# Altium PCB business card.PcbDoc
Units mm, origin at the board's own origin, x right, y up, seen from the top; angles counter-clockwise.
Board outline 85.6 x 54.21 mm, 4 copper layers (Component Side, Ground Plane, Power Plane, Solder Side), stack 0.844 mm thick; 5 components, 5 nets, 16 pads, 0 vias.
Unrouted connection lines stored in the file: 5.
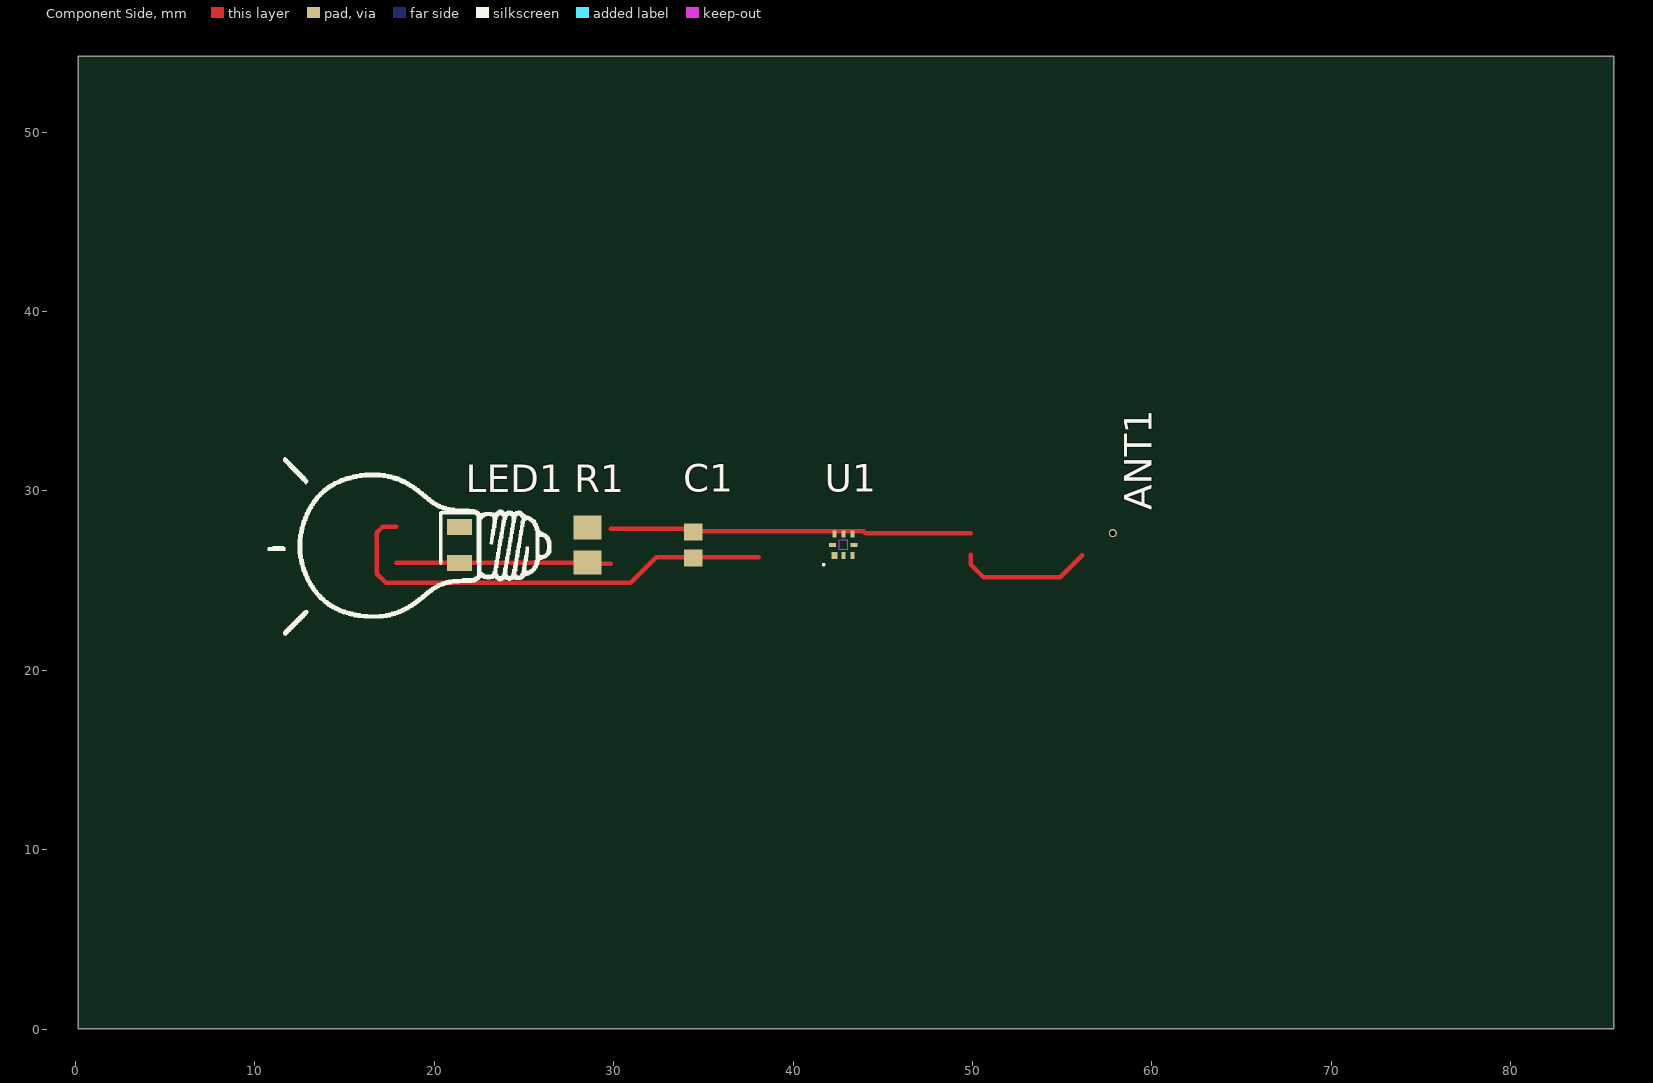
[diagram p0: Component Side view]
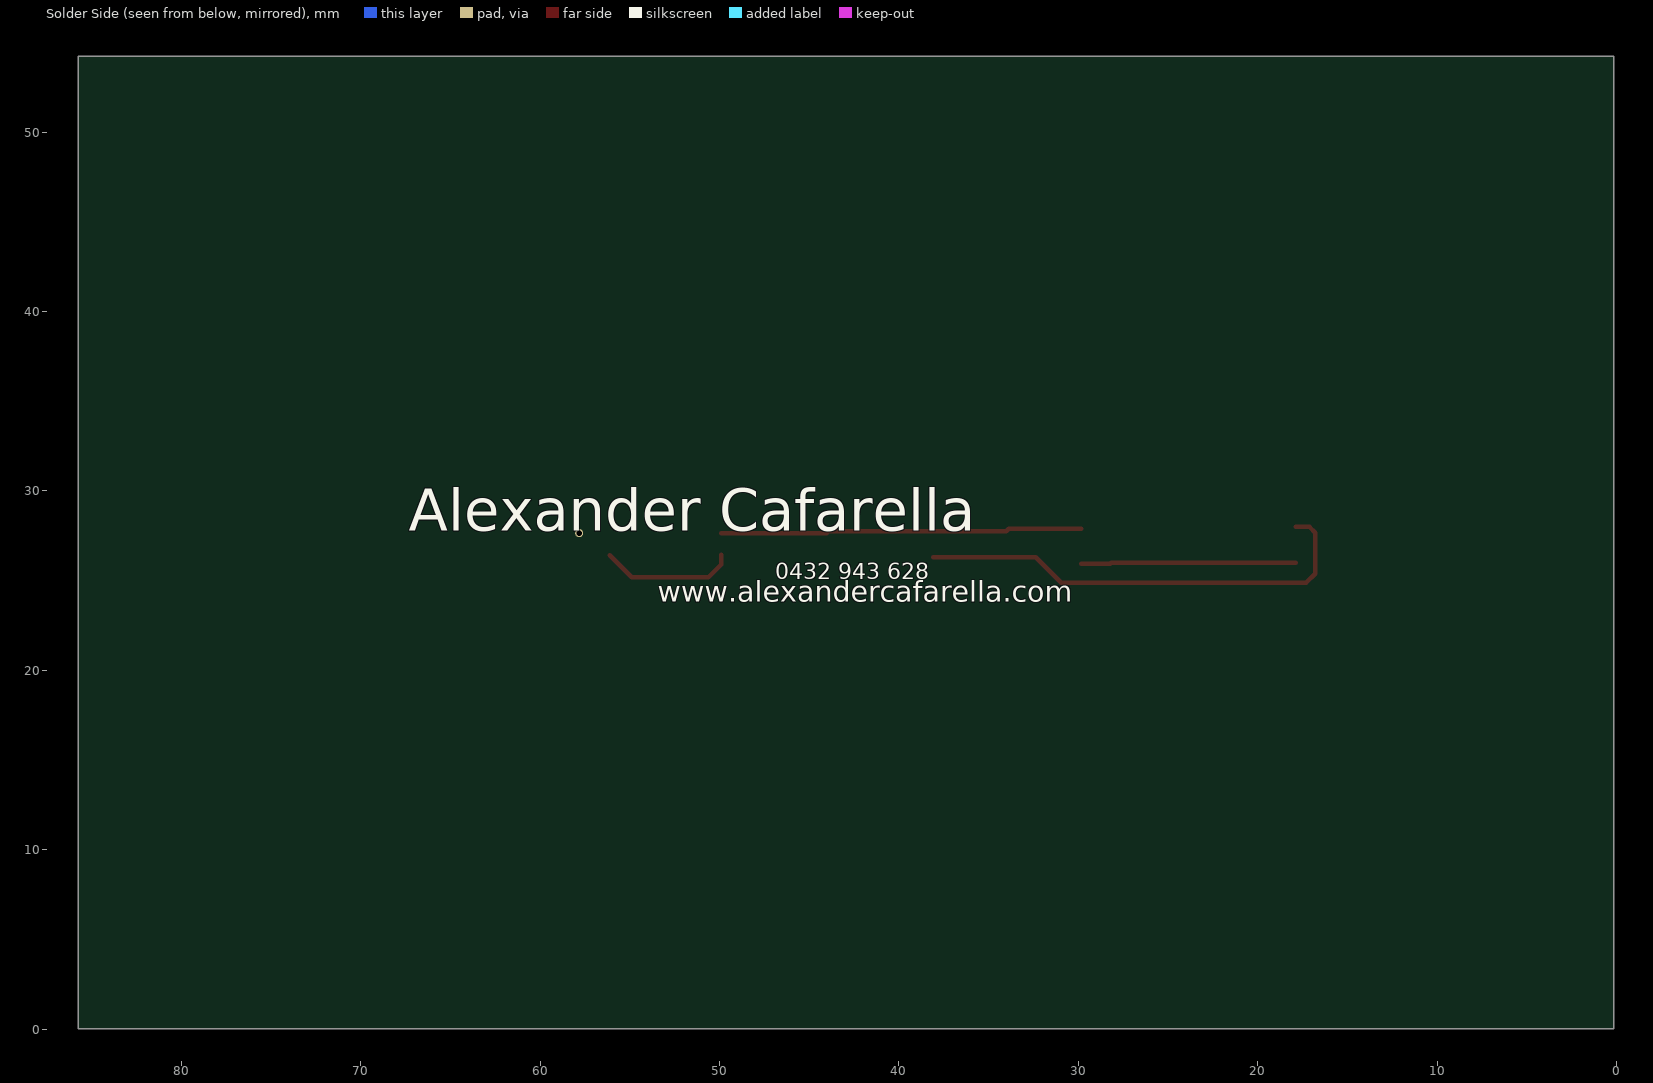
[diagram p1: Solder Side view, seen from below]
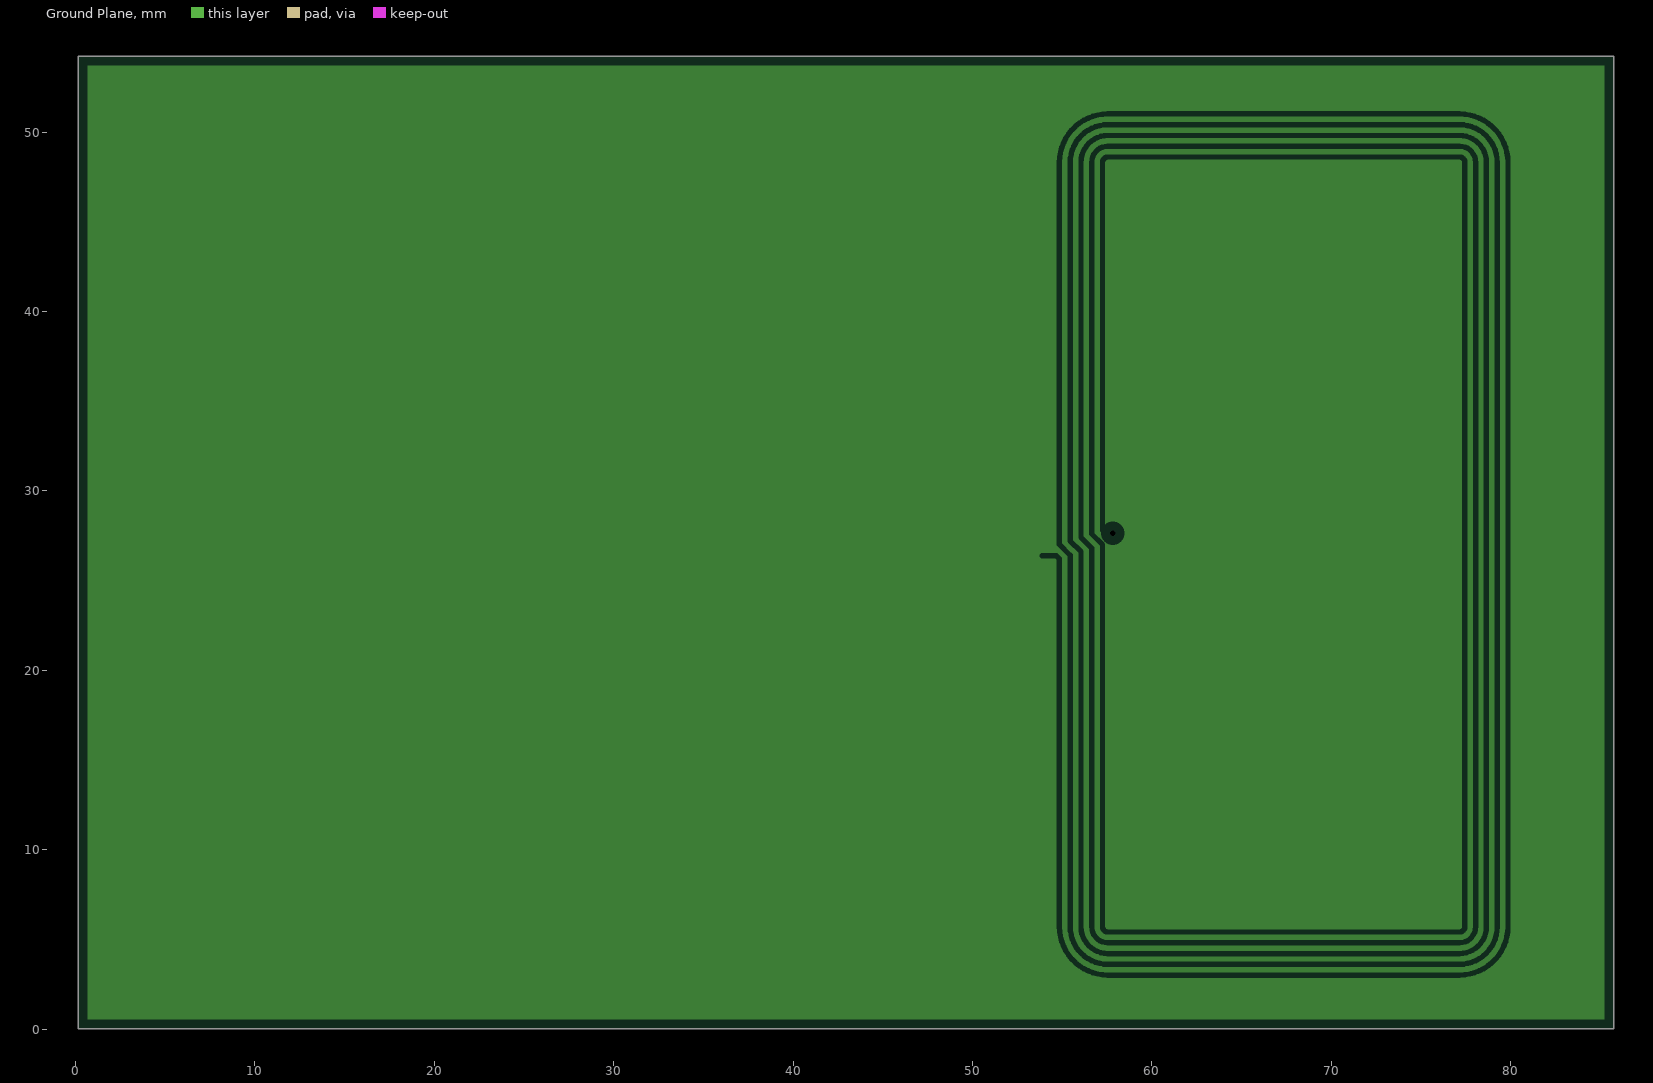
[diagram p2: Ground Plane, clearances drawn from the general rule]
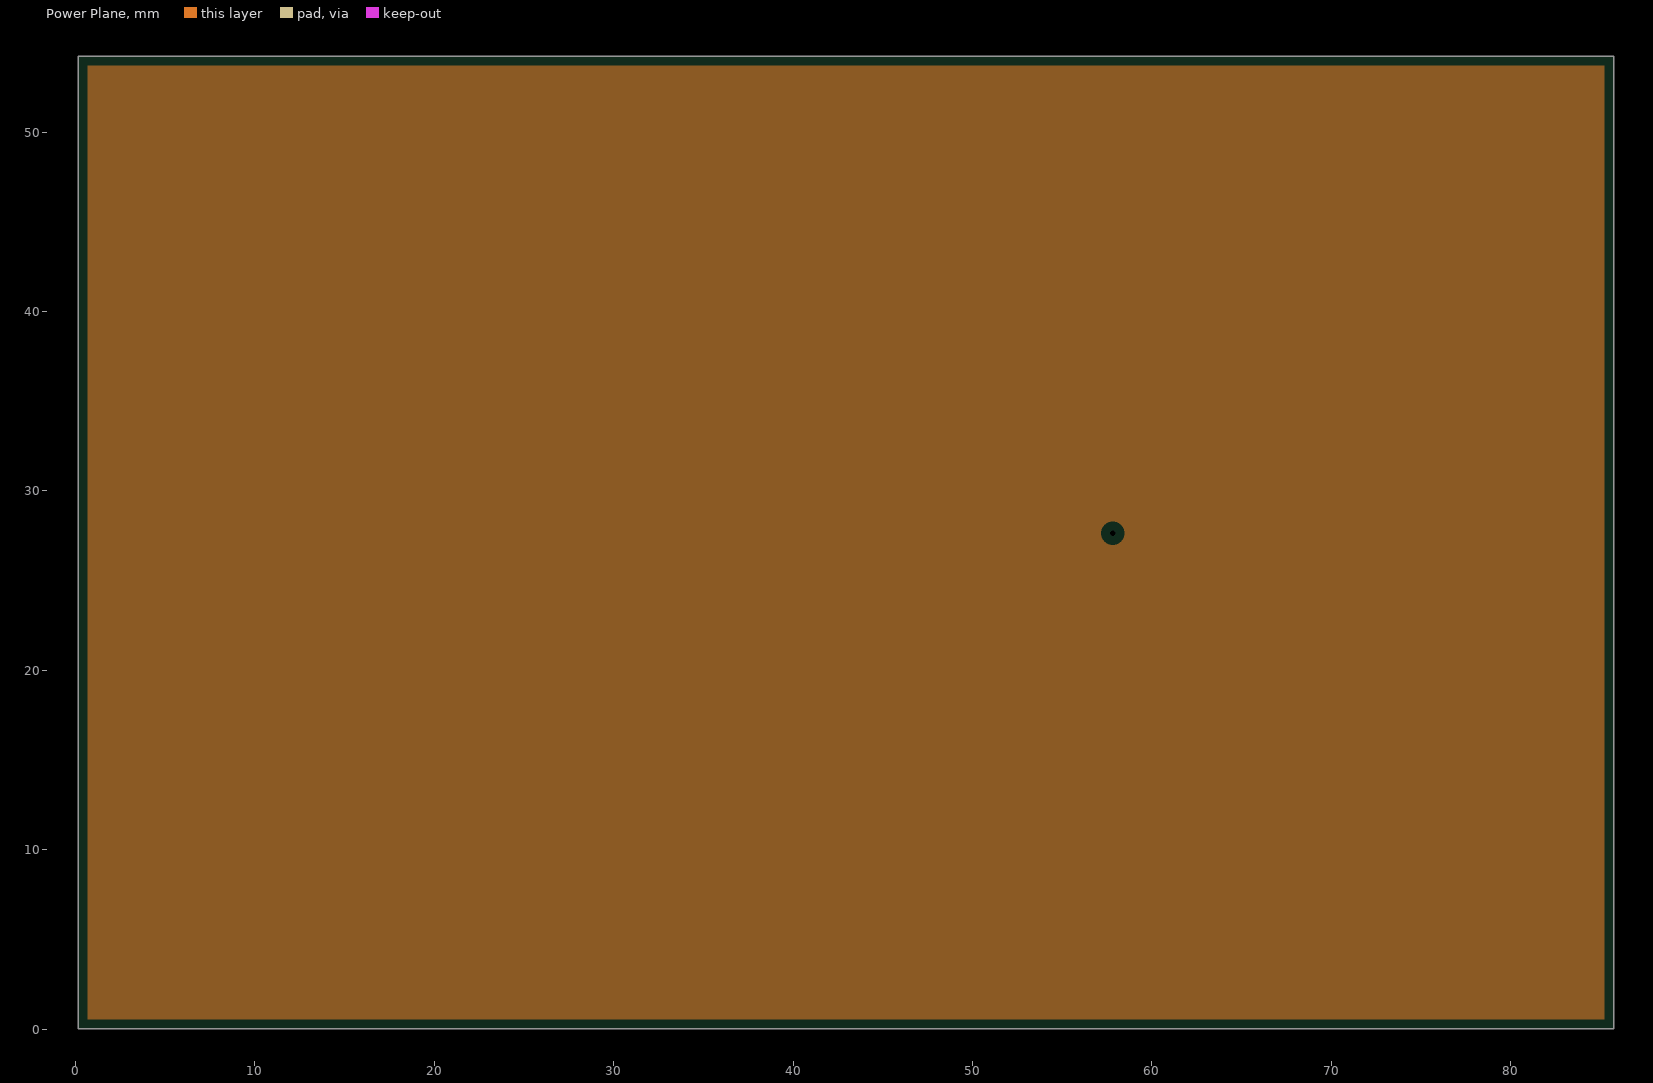
[diagram p3: Power Plane, clearances drawn from the general rule]

## Layer stack, top to bottom
Top Solder: solder mask 0.0102, Solder Resist, Dk 3.5
Component Side: signal copper 0.0356
Dielectric 1: core 0.32, FR-4, Dk 4.8
Ground Plane: plane copper 0.036
Dielectric 3: prepreg 0.127, Dk 4.2
Power Plane: plane copper 0.036
Dielectric 4: core 0.254, Dk 4.2
Solder Side: signal copper 0.0356
Bottom Solder: solder mask 0.0102, Solder Resist, Dk 3.5

## Board outline
0.146,54.229 85.744,54.229 85.744,0.014 0.146,0.014
cut-out: 42.926,104.267

## Design rules (kind name [scope] priority, off if disabled: settings)
Clearance [All] p1: gap=0.254 ignorepadtopadclearanceinfootprint=FALSE except(0: Arc-Hole Track-Hole SMDPad-Hole THPad-Hole Via-Hole Fill-Hole Poly-Hole Region-Hole Text-Hole)
PlaneClearance [All] p1: clearance=0.508
PlaneConnect [All] p1: planeconnectstyle=Relief reliefexpansion=0.508 reliefentries=4 reliefconductorwidth=0.254 reliefairgap=0.254
PolygonConnect [All] p1: connectstyle=Relief reliefconductorwidth=0.254 reliefentries=4 polygonreliefangle="90 Angle" airgapwidth=0.254
RoomDefinition "business card" [InComponentClass('business card')] p1: confinementstyle=ConfineIn formatcopy=TRUE lockcomponents=FALSE outline 0,0 85.598,0 85.598,53.975 0,53.975
RoutingVias [All] p1: holewidth=0.711 width=1.27 viastyle="Through Hole" minholewidth=0.711 minwidth=1.27 maxholewidth=0.711 maxwidth=1.27
SolderMaskExpansion [All] p1: expansion=0.102 istentingtop=FALSE
Width [All] p1: maxlimit=0.254 minlimit=0.254 preferedwidth=0.254
28 further rules are at their usual default settings.

## Classes and differential pairs
component class "business card": ANT1

## Components (designator, comment, footprint, x,y, rotation, side; value= is the part's Value field where it differs from the comment)
ANT1 "25x48 mm NFC loop antenna, L = 2,75 ÂµH" 25X48MM_NFC_ANTENNA 67.342,27.009 r90 top
C1 "GRM188R70J224KA88D" CAPC1608X90X35ML10T15 34.43,26.992 r270 top value=220nF
LED1 "AP2012SGD3" LEDC2012X110N 21.399,26.975 r270 top
R1 "ERJ-6ENF4700V" RESC2013X70X40ML20T20 28.537,26.987 r270 top value=47R
U1 "NT3H1101W0FHKH" NXP-SOT902-3_V 42.799,26.987 r90 top

## Footprints (in the part's own frame and the unit in brackets; to place one, negate y for a bottom-side part, rotate by r counter-clockwise, add the part's x,y. Pads: shape width x height; smd on the part's side, far side on the other; paste and mask are expansions set on the pad)
25X48MM_NFC_ANTENNA [mm]
  rect 0.3x0.75 on Plane1: P$1(-0.635,13.335)
  round 0.45 / inner round 1.524 / far side round 0.45 hole 0.3: P$2(0.635,9.525)
  Ground Plane lines w0.3: -0.635,13.462 -0.635,13.335 -0.635,12.665 -0.8,12.5 -21.3,12.5 ccw(c-21.3,9.8) -24,9.8 -24,-9.8 ccw(c-21.3,-9.8) -21.3,-12.5 21.3,-12.5 ccw(c21.3,-9.8) 24,-9.8 24,9.8 ccw(c21.3,9.8) 21.3,12.5 0,12.5 -0.6,11.9 -21.3,11.9 ; 0.635,9.525 0.635,9.935 0.8,10.1 21.3,10.1 cw(c21.3,9.8) 21.6,9.8 21.6,-9.8 cw(c21.3,-9.8) 21.3,-10.1 -21.3,-10.1 cw(c-21.3,-9.8) -21.6,-9.8 -21.6,9.8 cw(c-21.3,9.8) -21.3,10.1 0,10.1 0.6,10.7 21.3,10.7 ; -21.3,11.9 ccw(c-21.3,9.8) -23.4,9.8 -23.4,-9.8 ccw(c-21.3,-9.8) -21.3,-11.9 ; -21.3,11.9 -21.3,11.9 ; -21.3,11.9 -21.3,11.9 ; 21.3,11.9 cw(c21.3,9.8) 23.4,9.8 23.4,-9.8 cw(c21.3,-9.8) 21.3,-11.9 ; 21.3,11.9 21.3,11.9 ; 21.3,11.9 21.3,11.9 ; 21.3,11.9 0.2,11.9 -0.4,11.3 -21.3,11.3 ; -21.3,11.3 ccw(c-21.3,9.8) -22.8,9.8 -22.8,-9.8 ccw(c-21.3,-9.8) -21.3,-11.3 ; -21.3,11.3 -21.3,11.3 ; -21.3,11.3 -21.3,11.3 ; 21.3,11.3 cw(c21.3,9.8) 22.8,9.8 22.8,-9.8 cw(c21.3,-9.8) 21.3,-11.3 ; 21.3,11.3 21.3,11.3 ; 21.3,11.3 21.3,11.3 ; 21.3,11.3 0.4,11.3 -0.2,10.7 -21.3,10.7 ; -21.3,10.7 ccw(c-21.3,9.8) -22.2,9.8 -22.2,-9.8 ccw(c-21.3,-9.8) -21.3,-10.7 ; -21.3,10.7 -21.3,10.7 ; -21.3,10.7 -21.3,10.7 ; 21.3,10.7 cw(c21.3,9.8) 22.2,9.8 22.2,-9.8 cw(c21.3,-9.8) 21.3,-10.7 ; 21.3,10.7 21.3,10.7 ; 21.3,10.7 21.3,10.7 ; -21.3,-10.7 21.3,-10.7 ; -21.3,-10.7 -21.3,-10.7 ; 21.3,-10.7 ccw(c21.3,-9.8) 21.3,-10.7 ; 21.3,-10.7 21.3,-10.7 ; 21.3,-10.7 21.3,-10.7 ; -21.3,-11.3 21.3,-11.3 ; -21.3,-11.3 -21.3,-11.3 ; 21.3,-11.3 ccw(c21.3,-9.8) 21.3,-11.3 ; 21.3,-11.3 21.3,-11.3 ; 21.3,-11.3 21.3,-11.3 ; -21.3,-11.9 21.3,-11.9 ; -21.3,-11.9 -21.3,-11.9 ; 21.3,-11.9 ccw(c21.3,-9.8) 21.3,-11.9 ; 21.3,-11.9 21.3,-11.9 ; 21.3,-11.9 21.3,-11.9
CAPC1608X90X35ML10T15 [mm] "Chip Capacitor, 2-Leads, Body 1.60x0.80mm, IPC Low Density"
  rect 0.95x1.05 smd: 1(-0.725,0) 2(0.725,0)
  body extent -0.85,-0.45 0.85,0.45, height 0.9
LEDC2012X110N [mm]
  rect 0.9x1.4 smd: 1(-1,0) 2(1,0)
  silkscreen extent -1.8,-1.05 1,1.05
NXP-SOT902-3_V [mm] "QFN, 8-Leads, Body 1.6x1.6mm, Pitch 0.5mm"
  rect 0.4x0.32 smd: 1(-0.6,0.5)
  rect 0.4x0.22 smd: 2(-0.6,0) 3(-0.6,-0.5) 5(0.6,-0.5) 6(0.6,0) 7(0.6,0.5)
  rect 0.22x0.4 smd: 4(0,-0.6) 8(0,0.6)
  Component Side keep-out region: -0.25,-0.25 0.25,-0.25 0.25,0.25 -0.25,0.25
  silkscreen extent -1.15,1.05 -1.05,1.15, body extent -0.8,-0.8 0.8,0.8, height 0.5
RESC2013X70X40ML20T20 [mm] "Chip Resistor, 2-Leads, Body 2.00x1.25mm, IPC Low Density"
  rect 1.35x1.55 smd: 1(-0.975,0) 2(0.975,0)
  body extent -1.1,-0.72 1.1,0.72, height 0.7

## Part data
ANT1: library part 25X48MM_NFC_ANTENNA, DeviceSetName=25X48MM_NFC_ANTENNA, GateName_1=G$1, LibraryName=PCB_BusinessCard, Package=25X48MM_NFC_ANTENNA, SymbolName_1=ANTENNA
C1: library part CMP-2006-02828-1, Manufacturer=Murata, Part Number=GRM188R70J224KA88D
LED1: "LED", Manufacturer_Name=Kingbright, Mouser2 Part Number=604-AP2012SGD3, Datasheet Link=https://componentsearchengine.com/Datasheets/1/AP2012SGD3.pdf, Height=1.1mm, Manufacturer_Part_Number=AP2012SGD3, Mouser2 Price/Stock=https://www.mouser.com/Search/Refine.aspx?Keyword=604-AP2012SGD3
R1: library part CMP-1665-00004-3, "Chip Resistor, 470 Ohm, +/- 1%, 0.125 W, -55 to 155 degC, 0805 (2012 Metric), RoHS, Tape and Reel", Max Operating Temperature="155 degC", Min Operating Temperature="-55 degC", Package Quantity=1, Voltage Rating="150 V", DatasheetVersion=04/2015, Height="0.6 mm", Length="2 mm", Mount="Surface Mount", Mounting Technology="Surface Mount", PackageDescription="2-Pin Surface Mount Device, Body 2 x 1.25 mm", PackageReference=0805, Packaging="Cut Tape", Pins=2, REACH SVHC=Yes, RoHSCompliant=true
U1: library part CMP-2000-06861-1, "NTAG I2C-Energy Harvesting NFC Forum Type 2 Tag with Field Detection Pin and I2C Interface, 1.7 to 3.6 V, -40 to 95 degC, 8-Pin QFN (SOT-902-3), RoHS, Tape and Reel", Manufacturer=NXP, Maximum Operating Temperature=+85C, Minimum Operating Temperature=-40C, Operating Frequency=13.56MHz, Operating Temperature Range=-40Cto+85C, Package / Case=XQFN-8, Package Description="8-Pin Quad Flat No-lead Package, Body 1.6 x 1.6 mm, Pitch 0.5 mm", Package Reference=SOT902-3, Package Version=02/2016, Brand=NXPSemiconductors, Datasheet URL=http://www.nxp.com/documents/data_sheet/NT3H1101_1201.pdf, Datasheet Version="Rev. 3.3, 07/2015", Factory Pack Quantity=4000, Function=NTAGI2CNFCForumType2interface, Manufacturer URL=http://www.nxp.com/, Memory Size=1kB, Mounting Style=SMD/SMT, Mounting Technology=SurfaceMount, Package URL=http://www.nxp.com/documents/outline_drawing/SOT902-3.pdf, Packaging=Reel, Product Category=RFIDTransponders, RoHS=True

## Nets (pads, with @x,y where several pads share a name; then routed paths per layer and width w, separated by ;. In a path a pad name is that pad's centre, name@x,y a point inside that pad or via, vN(x,y) a via of type N, cw(c..) or ccw(c..) an arc to the next point about the centre after c; other vN are vias at no path point)
LA: U1.1 | length 7.6
  Component Side w0.254: 49.9,26.437 49.9,25.894 50.611,25.183 54.896,25.183 56.115,26.402
LB: ANT1.P$2 U1.8
NetC1_2: C1.2 LED1.1 U1.2 | length 25.6
  Component Side w0.254: 17.888,27.986 17.11,27.986 16.796,27.672 16.796,25.386 17.304,24.878 30.951,24.878 32.366,26.293 38.081,26.293
NetLED1_2: LED1.2 R1.2 | length 12
  Component Side w0.254: 17.888,25.986 28.162,25.986 28.213,25.935 29.826,25.935
VCC: C1.1 R1.1 U1.6 U1.7 | length 20.2
  Component Side w0.254: 29.826,27.885 33.864,27.885 34.006,27.743 38.081,27.743 43.923,27.743 44.029,27.637 49.9,27.637
pads on no net: ANT1.P$1 U1.3 U1.4 U1.5

## Polygon pours and split planes (outlines as drawn)
no net on Power Plane (split plane): 85.234,0.524 0.657,0.524 0.657,53.719 85.234,53.719
no net on Ground Plane (split plane): 85.234,0.524 0.657,0.524 0.657,53.719 85.234,53.719

## Silkscreen, mask and mechanical layers (free items; w line width, h text height)
Top Overlay:
  drawing of 4 lines, arcs and shapes, not listed
Bottom Overlay:
  text "Alexander Cafarella" at 67.323,26.987 h4
  text "0432 943 628" at 46.899,24.753 h1.52
  text "www.alexandercafarella.com" at 53.426,23.425 h2